# Altium PCB STM 32 F4 Robusta V1.PcbDoc (part 3 of 7)
Units mm, origin at the board's own origin, x right, y up, seen from the top; angles counter-clockwise.
Board outline 287.78 x 230 mm, 2 copper layers (Top Layer, Bottom Layer); 54 components, 96 nets, 355 pads, 16 vias.
Unrouted connection lines stored in the file: 3.
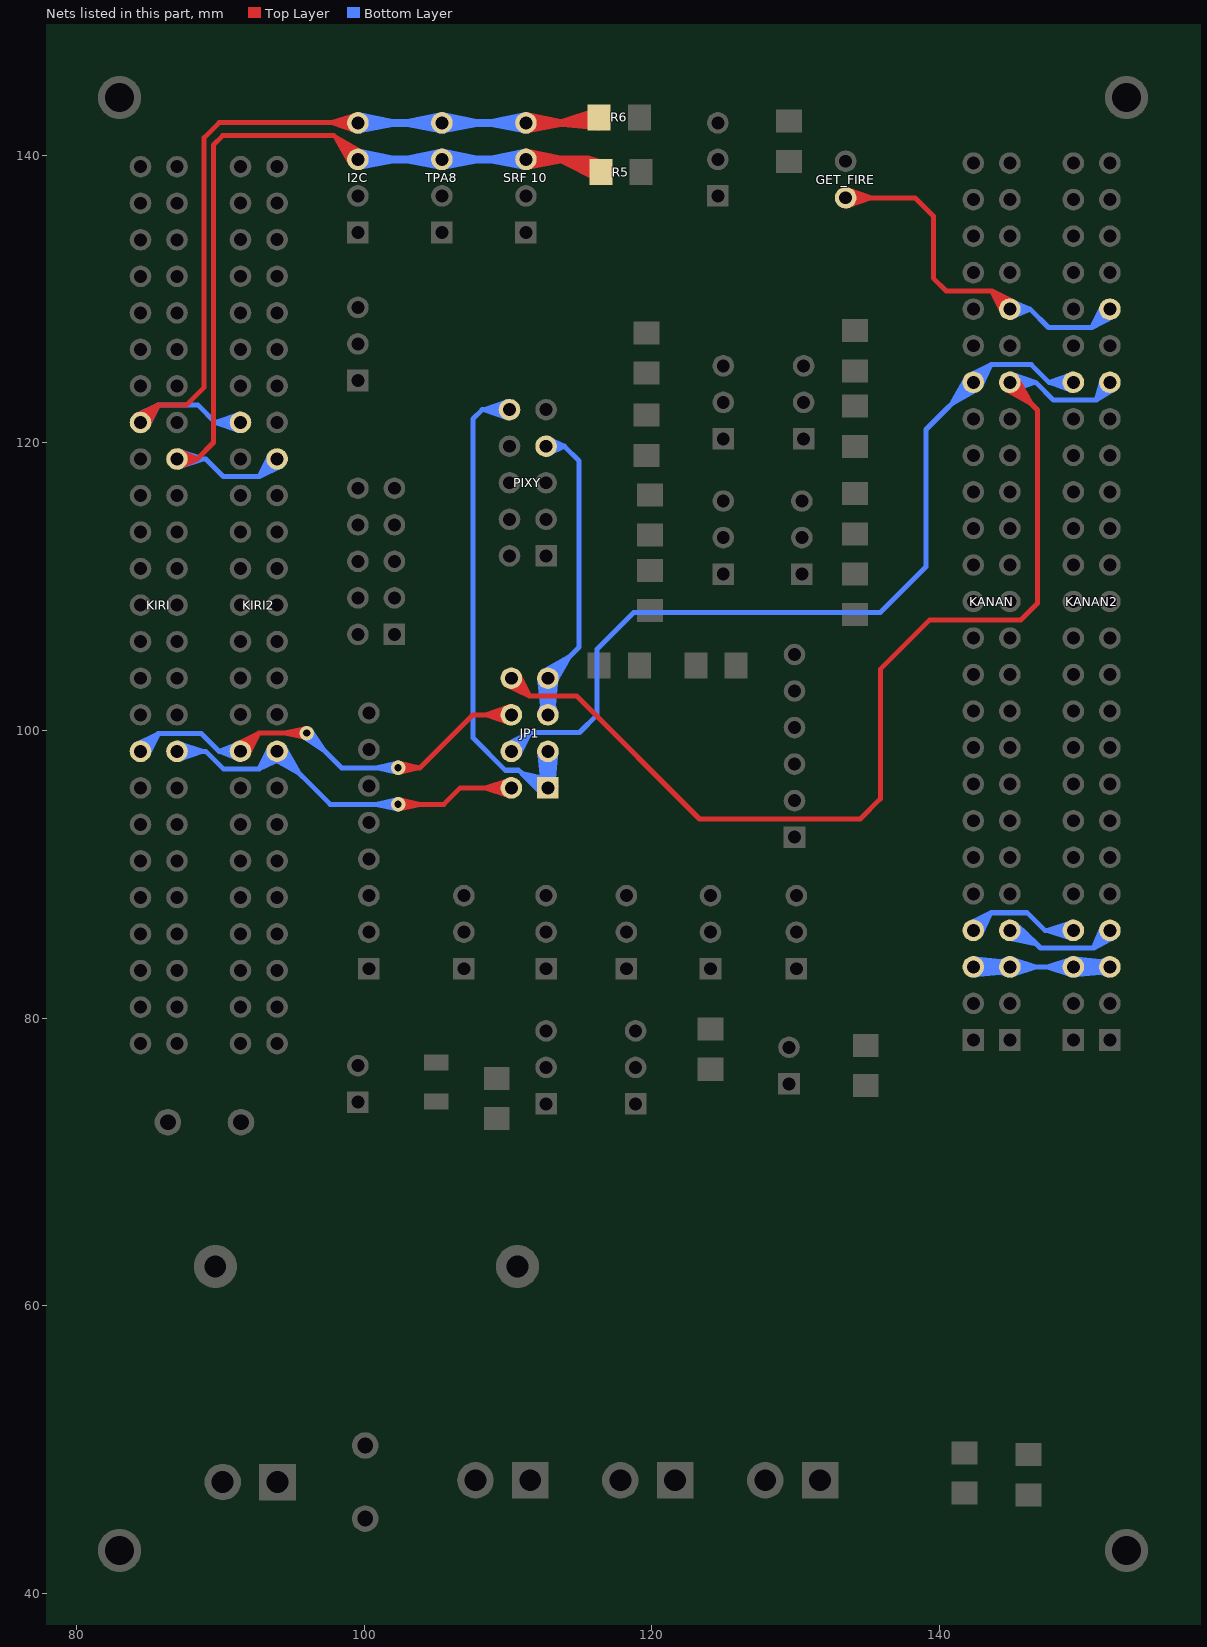
[diagram p3: the nets of this part, all layers, seen from the top]

## Via types
v1: diameter 1, hole 0.5, Top Layer to Bottom Layer, 13 vias
v2: diameter 0.8, hole 0.5, Top Layer to Bottom Layer, 3 vias

## Nets (pads, with @x,y where several pads share a name; then routed paths per layer and width w, separated by ;. In a path a pad name is that pad's centre, name@x,y a point inside that pad or via, vN(x,y) a via of type N, cw(c..) or ccw(c..) an arc to the next point about the centre after c; other vN are vias at no path point) (continued)
NetGET_FIRE_2: GET_FIRE.2 KANAN2.41 KANAN.41 | length 105.9
  Top Layer w0.35: GET_FIRE.2@133.512,136.811 134.506,137.08 ; GET_FIRE.2@133.512,137.255 134.506,136.986 ; GET_FIRE.2@133.569,136.465 135.277,137.033 ; GET_FIRE.2@133.569,137.601 135.277,137.033 ; GET_FIRE.2@133.612,136.474 134.506,136.986 ; GET_FIRE.2@133.612,137.592 134.506,137.08 ; GET_FIRE.2@133.663,136.489 134.506,137.08 ; GET_FIRE.2@133.663,137.577 134.506,136.986 ; GET_FIRE.2@133.884,136.626 cw(c134.865,135.645) 134.865,137.033 cw(c134.865,138.421) GET_FIRE.2@133.884,137.44 ; KANAN.41@144.315,129.286 ccw(c142.927,129.286) 143.908,130.268 ccw(c144.89,131.249) KANAN.41@144.89,129.861 ; KANAN.41@144.374,129.033 144.196,130.047 ; KANAN.41@144.399,128.986 144.129,129.98 ; KANAN.41@144.424,128.95 143.62,130.556 ; KANAN.41@144.708,129.153 144.196,130.047 ; KANAN.41@145.023,129.468 144.129,129.98 ; KANAN.41@145.143,129.802 144.129,129.98 ; KANAN.41@145.19,129.777 144.196,130.047 ; KANAN.41@145.226,129.752 143.62,130.556 ; GET_FIRE.2@133.477,137.033 134.506,137.08 ; GET_FIRE.2@133.477,137.033 134.506,136.986 ; GET_FIRE.2@133.477,137.033 138.303,137.033 139.573,135.763 139.573,131.445 140.462,130.556 143.62,130.556 ; 134.506,136.986 133.491,136.808 135.277,137.033 ; 134.506,137.08 133.491,137.258 135.277,137.033 ; 143.62,130.556 KANAN.41@144.89,129.286 ; 143.62,130.556 145.039,129.455 144.196,130.047 ; 143.62,130.556 144.721,129.137 144.129,129.98 ; 143.62,130.556 KANAN.41@144.89,129.286 ; 144.129,129.98 KANAN.41@144.89,129.286 ; 144.196,130.047 KANAN.41@144.89,129.286
  Bottom Layer w0.35: KANAN.41@144.904,129.061 145.919,129.239 ; KANAN.41@144.904,129.511 145.919,129.333 ; KANAN.41@144.908,129.062 146.304,129.286 ; KANAN.41@144.908,129.51 146.304,129.286 ; KANAN.41@144.925,129.064 145.919,129.333 ; KANAN.41@144.925,129.508 145.919,129.239 ; KANAN.41@145.007,128.723 146.304,129.286 ; KANAN.41@145.007,129.849 146.304,129.286 ; KANAN.41@145.025,128.727 145.919,129.239 ; KANAN.41@145.025,129.845 145.919,129.333 ; KANAN.41@145.076,128.742 145.919,129.333 ; KANAN.41@145.076,129.83 145.919,129.239 ; KANAN.41@145.297,128.879 cw(c146.278,127.898) 146.278,129.286 cw(c146.278,130.674) KANAN.41@145.297,129.693 ; KANAN2.41@151.27,129.286 cw(c149.882,129.286) 150.863,128.304 cw(c151.845,127.323) KANAN2.41@151.845,128.711 ; KANAN2.41@151.329,129.539 151.151,128.525 ; KANAN2.41@151.354,129.586 151.084,128.592 ; KANAN2.41@151.379,129.622 150.575,128.016 ; KANAN2.41@151.663,129.419 151.151,128.525 ; KANAN2.41@151.978,129.104 151.084,128.592 ; KANAN2.41@152.099,128.77 151.084,128.592 ; KANAN2.41@152.145,128.795 151.151,128.525 ; KANAN2.41@152.181,128.82 150.575,128.016 ; KANAN.41@144.89,129.286 145.919,129.333 ; KANAN.41@144.89,129.286 145.919,129.239 ; KANAN.41@144.89,129.286 146.304,129.286 ; 146.304,129.286 147.574,128.016 150.575,128.016 ; 150.575,128.016 KANAN2.41@151.845,129.286 ; 150.575,128.016 151.676,129.435 151.084,128.592 ; 150.575,128.016 151.994,129.117 151.151,128.525 ; 150.575,128.016 KANAN2.41@151.845,129.286 ; 151.084,128.592 KANAN2.41@151.845,129.286 ; 151.151,128.525 KANAN2.41@151.845,129.286
NetI2C_3: "SRF 10.3" I2C.3 KIRI2.33 KIRI.33 R5.1 TPA8.3 | length 233.8
  Top Layer w0.35: KIRI.33@87.009,118.647 88.024,118.825 ; KIRI.33@87.009,119.097 88.024,118.919 ; KIRI.33@87.013,118.648 88.392,118.872 ; KIRI.33@87.013,119.096 88.392,118.872 ; KIRI.33@87.03,118.65 88.024,118.919 ; KIRI.33@87.03,119.094 88.024,118.825 ; KIRI.33@87.113,118.309 88.392,118.872 ; KIRI.33@87.113,119.435 88.392,118.872 ; KIRI.33@87.13,118.313 88.024,118.825 ; KIRI.33@87.13,119.431 88.024,118.919 ; KIRI.33@87.181,118.328 88.024,118.919 ; KIRI.33@87.181,119.416 88.024,118.825 ; KIRI.33@87.402,118.465 cw(c88.383,117.484) 88.383,118.872 cw(c88.383,120.26) KIRI.33@87.402,119.279 ; I2C.3@98.993,139.7 ccw(c97.605,139.7) 98.586,140.682 ccw(c99.568,141.663) I2C.3@99.568,140.275 ; I2C.3@99.052,139.447 98.874,140.461 ; I2C.3@99.077,139.4 98.807,140.394 ; I2C.3@99.11,139.353 98.076,141.192 ; I2C.3@99.386,139.567 98.874,140.461 ; I2C.3@99.399,139.551 98.807,140.394 ; I2C.3@99.401,139.55 98.076,141.192 ; I2C.3@99.701,139.882 98.807,140.394 ; I2C.3@99.717,139.869 98.874,140.461 ; I2C.3@99.718,139.867 98.076,141.192 ; I2C.3@99.821,140.216 98.807,140.394 ; I2C.3@99.868,140.191 98.874,140.461 ; I2C.3@99.915,140.158 98.076,141.192 ; KIRI.33@86.995,118.872 88.024,118.919 ; KIRI.33@86.995,118.872 88.024,118.825 ; KIRI.33@86.995,118.872 88.392,118.872 ; 88.392,118.872 89.535,120.015 89.535,140.716 90.17,141.351 97.917,141.351 I2C.3@99.568,139.7 ; 98.076,141.192 I2C.3@99.568,139.7 ; 98.807,140.394 I2C.3@99.568,139.7 ; 98.874,140.461 I2C.3@99.568,139.7
  Top Layer w0.55: 111.299,139.227 113.652,139.7 111.299,140.173 ; 111.364,139.238 112.102,139.661 ; 111.364,140.162 112.102,139.739 ; 111.405,139.25 112.102,139.739 ; 111.405,140.15 112.102,139.661 ; 111.588,139.364 cw(c112.399,138.553) 112.399,139.7 cw(c112.399,140.847) 111.588,140.036 ; 113.284,139.7 cw(c113.284,135.739) R5.1@116.085,138.54 ; 114.612,139.7 cw(c114.612,137.067) R5.1@116.474,138.929 ; 115.63,139.637 cw(c114.905,138.911) R5.1@115.931,138.911 ; R5.1@116.104,138.522 115.293,139.61 ; R5.1@116.245,138.43 114.309,139.565 ; R5.1@116.265,138.422 113.708,139.7 ; R5.1@116.38,139.43 cw(c116.242,140.375) 115.567,139.7 ; R5.1@116.456,138.811 115.567,139.7 ; R5.1@116.549,139.428 114.309,139.565 ; R5.1@116.554,139.427 113.708,139.7 ; R5.1@116.634,139.405 115.293,139.61 ; 111.252,139.7 112.102,139.739 ; 111.252,139.7 112.102,139.661 ; 111.252,139.7 115.567,139.7 ; 113.708,139.7 R5.1@116.456,138.911 ; 114.309,139.565 R5.1@116.456,138.911 ; 115.293,139.61 R5.1@116.456,138.911 ; 115.567,139.7 R5.1@116.456,138.911 ; 115.567,139.7 116.709,139.371 115.567,139.7 ; 115.567,139.7 116.029,138.605 115.567,139.7 ; 115.567,139.7 R5.1@116.456,138.911
  Bottom Layer w0.35: KIRI.33@87.03,118.65 88.024,118.919 ; KIRI.33@87.03,119.094 88.024,118.825 ; KIRI.33@87.087,118.304 88.795,118.872 ; KIRI.33@87.087,119.44 88.795,118.872 ; KIRI.33@87.13,118.313 88.024,118.825 ; KIRI.33@87.13,119.431 88.024,118.919 ; KIRI.33@87.181,118.328 88.024,118.919 ; KIRI.33@87.181,119.416 88.024,118.825 ; KIRI.33@87.402,118.465 cw(c88.383,117.484) 88.383,118.872 cw(c88.383,120.26) KIRI.33@87.402,119.279 ; KIRI2.33@93.375,118.877 cw(c91.987,118.877) 92.968,117.895 cw(c93.95,116.914) KIRI2.33@93.95,118.302 ; KIRI2.33@93.434,119.13 93.256,118.116 ; KIRI2.33@93.459,119.177 93.189,118.183 ; KIRI2.33@93.482,119.21 92.725,117.652 ; KIRI2.33@93.768,119.01 93.256,118.116 ; KIRI2.33@94.083,118.695 93.189,118.183 ; KIRI2.33@94.203,118.361 93.189,118.183 ; KIRI2.33@94.25,118.386 93.256,118.116 ; KIRI2.33@94.283,118.409 92.725,117.652 ; KIRI.33@86.995,118.872 88.024,118.919 ; KIRI.33@86.995,118.872 88.024,118.825 ; KIRI.33@86.995,118.872 88.997,118.872 90.217,117.652 92.725,117.652 ; 88.024,118.825 87.009,118.647 88.795,118.872 ; 88.024,118.919 87.009,119.097 88.795,118.872 ; 92.725,117.652 KIRI2.33@93.95,118.877 ; 92.725,117.652 93.781,119.025 93.189,118.183 ; 92.725,117.652 94.098,118.708 93.256,118.116 ; 92.725,117.652 KIRI2.33@93.95,118.877 ; 93.189,118.183 KIRI2.33@93.95,118.877 ; 93.256,118.116 KIRI2.33@93.95,118.877
  Bottom Layer w0.55: I2C.3@99.615,139.227 101.968,139.7 I2C.3@99.615,140.173 ; I2C.3@99.68,139.238 100.418,139.661 ; I2C.3@99.68,140.162 100.418,139.739 ; I2C.3@99.721,139.25 100.418,139.739 ; I2C.3@99.721,140.15 100.418,139.661 ; I2C.3@99.904,139.364 cw(c100.715,138.553) 100.715,139.7 cw(c100.715,140.847) I2C.3@99.904,140.036 ; TPA8.3@105.074,139.364 ccw(c104.263,138.553) 104.263,139.7 ccw(c104.263,140.847) TPA8.3@105.074,140.036 ; TPA8.3@105.257,139.25 104.56,139.739 ; TPA8.3@105.257,140.15 104.56,139.661 ; TPA8.3@105.298,139.238 104.56,139.661 ; TPA8.3@105.298,140.162 104.56,139.739 ; TPA8.3@105.363,139.227 103.01,139.7 TPA8.3@105.363,140.173 ; TPA8.3@105.457,139.227 107.81,139.7 TPA8.3@105.457,140.173 ; TPA8.3@105.522,139.238 106.26,139.661 ; TPA8.3@105.522,140.162 106.26,139.739 ; TPA8.3@105.563,139.25 106.26,139.739 ; TPA8.3@105.563,140.15 106.26,139.661 ; TPA8.3@105.746,139.364 cw(c106.557,138.553) 106.557,139.7 cw(c106.557,140.847) TPA8.3@105.746,140.036 ; 110.916,139.364 ccw(c110.105,138.553) 110.105,139.7 ccw(c110.105,140.847) 110.916,140.036 ; 111.099,139.25 110.402,139.739 ; 111.099,140.15 110.402,139.661 ; 111.14,139.238 110.402,139.661 ; 111.14,140.162 110.402,139.739 ; 111.205,139.227 108.852,139.7 111.205,140.173 ; I2C.3@99.568,139.7 100.418,139.739 ; I2C.3@99.568,139.7 100.418,139.661 ; I2C.3@99.568,139.7 TPA8.3@105.41,139.7 ; 104.56,139.661 TPA8.3@105.41,139.7 ; 104.56,139.739 TPA8.3@105.41,139.7 ; TPA8.3@105.41,139.7 106.26,139.739 ; TPA8.3@105.41,139.7 106.26,139.661 ; TPA8.3@105.41,139.7 111.252,139.7 ; 110.402,139.661 111.252,139.7 ; 110.402,139.739 111.252,139.7
NetI2C_4: "SRF 10.4" I2C.4 KIRI2.36 KIRI.36 R6.1 TPA8.4 | length 212
  Top Layer w0.35: KIRI.36@84.122,121.88 85.68,122.637 ; KIRI.36@84.155,121.903 85.149,122.173 ; KIRI.36@84.202,121.928 85.216,122.106 ; KIRI.36@84.322,121.594 85.216,122.106 ; KIRI.36@84.455,121.987 ccw(c84.455,123.375) 85.437,122.394 ccw(c86.418,121.412) KIRI.36@85.03,121.412 ; KIRI.36@84.637,121.279 85.149,122.173 ; KIRI.36@84.923,121.079 85.68,122.637 ; KIRI.36@84.946,121.112 85.216,122.106 ; KIRI.36@84.971,121.159 85.149,122.173 ; 98.144,142.255 cw(c98.144,140.816) I2C.4@99.161,141.833 ; 98.216,142.255 ccw(c98.216,143.592) I2C.4@99.161,142.647 ; I2C.4@99.371,141.7 98.562,142.301 ; I2C.4@99.393,142.788 98.516,142.206 ; I2C.4@99.429,141.682 98.516,142.206 ; I2C.4@99.437,142.8 98.562,142.301 ; I2C.4@99.471,141.673 97.768,142.255 ; I2C.4@99.481,142.808 97.768,142.255 ; I2C.4@99.529,142.018 98.562,142.301 ; I2C.4@99.537,142.463 98.516,142.206 ; I2C.4@99.556,142.465 97.768,142.255 ; I2C.4@99.556,142.465 98.562,142.301 ; KIRI.36@84.455,121.412 85.149,122.173 ; KIRI.36@84.455,121.412 85.216,122.106 ; KIRI.36@84.455,121.412 85.68,122.637 ; 85.149,122.173 84.306,121.581 85.68,122.637 ; 85.216,122.106 84.624,121.263 85.68,122.637 ; 85.68,122.637 87.666,122.637 88.885,123.856 88.885,141.209 89.931,142.255 99.553,142.255 I2C.4@99.568,142.24 ; 97.768,142.255 I2C.4@99.568,142.24 ; 97.768,142.255 99.552,142.016 98.516,142.206 ; 98.516,142.206 I2C.4@99.568,142.24 ; 98.562,142.301 I2C.4@99.568,142.24
  Top Layer w0.55: 111.299,141.767 113.652,142.24 111.299,142.713 ; 111.364,141.778 112.102,142.201 ; 111.364,142.702 112.102,142.279 ; 111.405,141.79 112.102,142.279 ; 111.405,142.69 112.102,142.201 ; 111.588,141.904 cw(c112.399,141.093) 112.399,142.24 cw(c112.399,143.387) 111.588,142.576 ; 114.383,142.24 ccw(c114.383,144.467) R6.1@115.958,142.892 ; R6.1@115.948,142.24 111.252,142.24 ; R6.1@116.154,143.016 114.959,142.316 ; R6.1@116.219,143.034 113.77,142.24 ; R6.1@116.307,141.996 114.959,142.316 ; R6.1@116.333,141.996 113.77,142.24 ; 111.252,142.24 112.102,142.279 ; 111.252,142.24 112.102,142.201 ; 113.77,142.24 116.329,142.521 114.959,142.316
  Bottom Layer w0.35: KIRI.36@84.122,121.88 85.68,122.637 ; KIRI.36@84.155,121.903 85.149,122.173 ; KIRI.36@84.202,121.928 85.216,122.106 ; KIRI.36@84.322,121.594 85.216,122.106 ; KIRI.36@84.455,121.987 ccw(c84.455,123.375) 85.437,122.394 ccw(c86.418,121.412) KIRI.36@85.03,121.412 ; KIRI.36@84.637,121.279 85.149,122.173 ; KIRI.36@84.923,121.079 85.68,122.637 ; KIRI.36@84.946,121.112 85.216,122.106 ; KIRI.36@84.971,121.159 85.149,122.173 ; KIRI2.36@91.003,121.01 ccw(c90.022,120.029) 90.022,121.417 ccw(c90.022,122.805) KIRI2.36@91.003,121.824 ; KIRI2.36@91.224,120.873 90.381,121.464 ; KIRI2.36@91.224,121.961 90.381,121.37 ; KIRI2.36@91.275,120.858 90.381,121.37 ; KIRI2.36@91.275,121.976 90.381,121.464 ; KIRI2.36@91.316,120.85 89.657,121.417 ; KIRI2.36@91.316,121.984 89.657,121.417 ; KIRI2.36@91.375,121.195 90.381,121.464 ; KIRI2.36@91.375,121.639 90.381,121.37 ; KIRI.36@84.455,121.412 85.149,122.173 ; KIRI.36@84.455,121.412 85.216,122.106 ; KIRI.36@84.455,121.412 85.68,122.637 ; 85.149,122.173 84.306,121.581 85.68,122.637 ; 85.216,122.106 84.624,121.263 85.68,122.637 ; 85.68,122.637 88.437,122.637 89.657,121.417 ; 89.657,121.417 KIRI2.36@91.41,121.417 ; 89.657,121.417 91.396,121.642 90.381,121.464 ; 89.657,121.417 91.396,121.192 90.381,121.37 ; 89.657,121.417 KIRI2.36@91.41,121.417 ; 90.381,121.37 KIRI2.36@91.41,121.417 ; 90.381,121.464 KIRI2.36@91.41,121.417
  Bottom Layer w0.55: I2C.4@99.615,141.767 101.968,142.24 I2C.4@99.615,142.713 ; I2C.4@99.68,141.778 100.418,142.201 ; I2C.4@99.68,142.702 100.418,142.279 ; I2C.4@99.721,141.79 100.418,142.279 ; I2C.4@99.721,142.69 100.418,142.201 ; I2C.4@99.904,141.904 cw(c100.715,141.093) 100.715,142.24 cw(c100.715,143.387) I2C.4@99.904,142.576 ; TPA8.4@105.074,141.904 ccw(c104.263,141.093) 104.263,142.24 ccw(c104.263,143.387) TPA8.4@105.074,142.576 ; TPA8.4@105.257,141.79 104.56,142.279 ; TPA8.4@105.257,142.69 104.56,142.201 ; TPA8.4@105.298,141.778 104.56,142.201 ; TPA8.4@105.298,142.702 104.56,142.279 ; TPA8.4@105.363,141.767 103.01,142.24 TPA8.4@105.363,142.713 ; TPA8.4@105.457,141.767 107.81,142.24 TPA8.4@105.457,142.713 ; TPA8.4@105.522,141.778 106.26,142.201 ; TPA8.4@105.522,142.702 106.26,142.279 ; TPA8.4@105.563,141.79 106.26,142.279 ; TPA8.4@105.563,142.69 106.26,142.201 ; TPA8.4@105.746,141.904 cw(c106.557,141.093) 106.557,142.24 cw(c106.557,143.387) TPA8.4@105.746,142.576 ; 110.916,141.904 ccw(c110.105,141.093) 110.105,142.24 ccw(c110.105,143.387) 110.916,142.576 ; 111.099,141.79 110.402,142.279 ; 111.099,142.69 110.402,142.201 ; 111.14,141.778 110.402,142.201 ; 111.14,142.702 110.402,142.279 ; 111.205,141.767 108.852,142.24 111.205,142.713 ; I2C.4@99.568,142.24 100.418,142.279 ; I2C.4@99.568,142.24 100.418,142.201 ; I2C.4@99.568,142.24 TPA8.4@105.41,142.24 ; 104.56,142.201 TPA8.4@105.41,142.24 ; 104.56,142.279 TPA8.4@105.41,142.24 ; TPA8.4@105.41,142.24 106.26,142.279 ; TPA8.4@105.41,142.24 106.26,142.201 ; TPA8.4@105.41,142.24 111.252,142.24 ; 110.402,142.201 111.252,142.24 ; 110.402,142.279 111.252,142.24
NetJP1_1: JP1.1 JP1.3 PIXY.1 | length 166.6
  Bottom Layer w0.35: PIXY.1@109.702,121.894 ccw(c108.721,120.913) 108.721,122.301 ccw(c108.721,123.689) PIXY.1@109.702,122.708 ; PIXY.1@109.923,121.757 109.08,122.348 ; PIXY.1@109.923,122.845 109.08,122.254 ; PIXY.1@109.974,121.742 109.08,122.254 ; PIXY.1@109.974,122.86 109.08,122.348 ; PIXY.1@110.017,121.733 108.309,122.301 ; PIXY.1@110.017,122.869 108.309,122.301 ; PIXY.1@110.074,122.079 109.08,122.348 ; PIXY.1@110.074,122.523 109.08,122.254 ; 111.241,96.74 ccw(c112.5,97.999) JP1.1@112.745,96.235 ; 111.738,96.242 ccw(c112.621,97.125) JP1.1@112.793,95.888 ; JP1.3@112.202,98.582 JP1.1@112.39,96.65 ; JP1.3@112.203,98.506 JP1.1@112.637,96.703 ; JP1.1@112.208,96.104 JP1.3@112.776,97.812 ; JP1.3@112.208,98.46 JP1.1@112.776,96.752 ; JP1.3@112.216,98.42 JP1.1@112.915,96.703 ; JP1.1@112.217,96.147 112.729,97.041 ; JP1.3@112.217,98.417 112.729,97.523 ; JP1.1@112.233,95.824 ccw(c111.968,95.732) 111.968,96.012 ; JP1.1@112.232,96.198 112.823,97.041 ; JP1.1@112.233,96.2 cw(c111.968,96.292) 111.968,96.012 ; JP1.3@112.232,98.366 112.823,97.523 ; JP1.3@112.236,98.355 JP1.1@113.162,96.65 ; JP1.1@112.369,96.419 ccw(c111.388,97.4) 112.776,97.4 ccw(c114.164,97.4) JP1.1@113.183,96.419 ; JP1.3@112.369,98.145 cw(c111.388,97.164) 112.776,97.164 cw(c114.164,97.164) JP1.3@113.183,98.145 ; JP1.1@112.399,95.577 111.509,96.729 ; JP1.1@112.431,95.552 110.977,97.003 ; JP1.1@112.436,95.548 111.83,96.349 ; JP1.3@112.551,98.555 JP1.1@112.637,96.703 ; JP1.3@112.553,98.521 JP1.1@112.915,96.703 ; JP1.1@112.554,96.047 112.823,97.041 ; JP1.3@112.554,98.517 112.823,97.523 ; JP1.3@112.553,98.584 JP1.1@112.39,96.65 ; JP1.3@112.558,98.495 JP1.1@113.162,96.65 ; JP1.1@112.65,95.825 111.509,96.729 ; JP1.1@112.657,95.821 110.977,97.003 ; JP1.1@112.677,95.81 111.83,96.349 ; JP1.1@112.697,96.582 cw(c112.379,98.872) 110.743,97.237 ; JP1.1@112.806,96.586 111.83,96.349 ; JP1.1@112.827,96.231 111.83,96.349 ; JP1.1@112.871,96.216 111.509,96.729 ; JP1.1@112.874,96.215 110.977,97.003 ; JP1.1@112.955,96.558 111.509,96.729 ; JP1.1@112.98,96.549 110.977,97.003 ; JP1.3@112.994,98.495 JP1.1@112.39,96.65 ; JP1.1@112.998,96.047 112.729,97.041 ; JP1.3@112.998,98.517 112.729,97.523 ; JP1.3@112.999,98.584 JP1.1@113.162,96.65 ; JP1.3@112.999,98.521 JP1.1@112.637,96.703 ; JP1.3@113.001,98.555 JP1.1@112.915,96.703 ; JP1.3@113.316,98.355 JP1.1@112.39,96.65 ; JP1.1@113.32,96.198 112.729,97.041 ; JP1.3@113.32,98.366 112.729,97.523 ; JP1.1@113.335,96.147 112.823,97.041 ; JP1.3@113.335,98.417 112.823,97.523 ; JP1.3@113.336,98.42 JP1.1@112.637,96.703 ; JP1.1@113.344,96.104 JP1.3@112.776,97.812 ; JP1.3@113.344,98.46 JP1.1@112.776,96.752 ; JP1.3@113.349,98.506 JP1.1@112.915,96.703 ; JP1.3@113.35,98.582 JP1.1@113.162,96.65 ; 108.309,122.301 110.095,122.526 109.08,122.348 ; 108.309,122.301 110.095,122.076 109.08,122.254 ; 109.08,122.254 PIXY.1@110.109,122.301 ; 109.08,122.348 PIXY.1@110.109,122.301 ; PIXY.1@110.109,122.301 108.204,122.301 107.569,121.666 107.569,99.487 109.819,97.237 110.743,97.237 ; 110.743,97.237 111.968,96.012 ; 110.977,97.003 JP1.1@112.776,96.012 ; 111.509,96.729 JP1.1@112.776,96.012 ; 111.83,96.349 JP1.1@112.776,96.012 ; 111.968,96.012 JP1.1@112.776,96.012 ; 111.968,96.012 112.745,96.235 111.968,96.012 ; 111.968,96.012 112.745,95.789 111.968,96.012 ; 111.968,96.012 112.571,96.549 111.968,96.012 ; 111.968,96.012 112.571,95.475 111.968,96.012 ; 111.968,96.012 JP1.1@112.776,96.012 ; JP1.1@112.39,96.65 JP1.3@112.776,98.552 ; JP1.1@112.637,96.703 JP1.3@112.776,98.552 ; 112.729,97.041 JP1.1@112.776,96.012 ; 112.729,97.041 112.551,96.026 JP1.3@112.776,97.812 ; 112.729,97.523 JP1.3@112.776,98.552 ; 112.729,97.523 112.551,98.538 JP1.1@112.776,96.752 ; JP1.1@112.776,96.012 112.823,97.041 ; JP1.1@112.776,96.012 JP1.3@112.776,98.552 ; JP1.1@112.776,96.752 113.001,98.538 112.823,97.523 ; JP1.3@112.776,97.812 113.001,96.026 112.823,97.041 ; JP1.3@112.776,98.552 JP1.1@112.915,96.703 ; JP1.3@112.776,98.552 JP1.1@113.162,96.65 ; JP1.3@112.776,98.552 112.823,97.523
NetJP1_2: JP1.2 KIRI2.17 KIRI.17 | length 124.9
  Top Layer w0.35: v1@102.396,94.546 103.912,94.869 v1@102.396,95.192 ; v1@102.438,94.553 102.944,94.842 ; v1@102.438,95.185 102.944,94.896 ; v1@102.467,94.561 102.944,94.896 ; v1@102.467,95.177 102.944,94.842 ; v1@102.592,94.639 cw(c103.147,94.084) 103.147,94.869 cw(c103.147,95.654) v1@102.592,95.099 ; JP1.2@109.829,95.605 ccw(c108.848,94.624) 108.848,96.012 ccw(c108.848,97.4) JP1.2@109.829,96.419 ; JP1.2@110.05,95.468 109.207,96.059 ; JP1.2@110.05,96.556 109.207,95.965 ; JP1.2@110.101,95.453 109.207,95.965 ; JP1.2@110.101,96.571 109.207,96.059 ; JP1.2@110.144,95.444 108.436,96.012 ; JP1.2@110.144,96.58 108.436,96.012 ; JP1.2@110.201,95.79 109.207,96.059 ; JP1.2@110.201,96.234 109.207,95.965 ; v1(102.362,94.869) 102.944,94.896 ; v1(102.362,94.869) 102.944,94.842 ; v1(102.362,94.869) 105.537,94.869 106.68,96.012 JP1.2@110.236,96.012 ; 108.436,96.012 110.222,96.237 109.207,96.059 ; 108.436,96.012 110.222,95.787 109.207,95.965 ; 109.207,95.965 JP1.2@110.236,96.012 ; 109.207,96.059 JP1.2@110.236,96.012
  Bottom Layer w0.35: KIRI.17@87.03,98.33 88.024,98.599 ; KIRI.17@87.03,98.774 88.024,98.505 ; KIRI.17@87.087,97.984 88.795,98.552 ; KIRI.17@87.087,99.12 88.795,98.552 ; KIRI.17@87.13,97.993 88.024,98.505 ; KIRI.17@87.13,99.111 88.024,98.599 ; KIRI.17@87.181,98.008 88.024,98.599 ; KIRI.17@87.181,99.096 88.024,98.505 ; KIRI.17@87.402,98.145 cw(c88.383,97.164) 88.383,98.552 cw(c88.383,99.94) KIRI.17@87.402,98.959 ; KIRI2.17@93.375,98.557 cw(c91.987,98.557) 92.968,97.575 cw(c93.95,96.594) 93.95,97.982 cw(c93.95,96.594) 94.932,97.575 cw(c95.913,98.557) KIRI2.17@94.525,98.557 ; KIRI2.17@93.434,98.81 93.256,97.796 ; KIRI2.17@93.459,98.857 93.189,97.863 ; KIRI2.17@93.482,98.89 92.725,97.332 ; KIRI2.17@93.603,98.099 95.442,97.065 ; KIRI2.17@93.65,98.066 94.644,97.796 ; KIRI2.17@93.696,98.041 94.711,97.863 ; KIRI2.17@93.768,98.69 93.256,97.796 ; KIRI2.17@93.8,98.39 95.442,97.065 ; KIRI2.17@93.801,98.388 94.644,97.796 ; KIRI2.17@93.817,98.375 94.711,97.863 ; KIRI2.17@94.083,98.375 93.189,97.863 ; KIRI2.17@94.117,98.707 95.442,97.065 ; KIRI2.17@94.119,98.706 94.711,97.863 ; KIRI2.17@94.132,98.69 94.644,97.796 ; KIRI2.17@94.203,98.041 93.189,97.863 ; KIRI2.17@94.25,98.066 93.256,97.796 ; KIRI2.17@94.283,98.089 92.725,97.332 ; KIRI2.17@94.408,98.904 95.442,97.065 ; KIRI2.17@94.441,98.857 94.711,97.863 ; KIRI2.17@94.466,98.81 94.644,97.796 ; v1@102.132,94.639 ccw(c101.577,94.084) 101.577,94.869 ccw(c101.577,95.654) v1@102.132,95.099 ; v1@102.257,94.561 101.78,94.896 ; v1@102.257,95.177 101.78,94.842 ; v1@102.286,94.553 101.78,94.842 ; v1@102.286,95.185 101.78,94.896 ; v1@102.328,94.546 100.812,94.869 ; v1@102.328,95.192 100.812,94.869 ; KIRI.17@86.995,98.552 88.024,98.599 ; KIRI.17@86.995,98.552 88.024,98.505 ; KIRI.17@86.995,98.552 88.997,98.552 90.217,97.332 92.725,97.332 ; 88.024,98.505 87.009,98.327 88.795,98.552 ; 88.024,98.599 87.009,98.777 88.795,98.552 ; 92.725,97.332 KIRI2.17@93.95,98.557 ; 92.725,97.332 93.781,98.705 93.189,97.863 ; 92.725,97.332 94.098,98.388 93.256,97.796 ; 92.725,97.332 KIRI2.17@93.95,98.557 ; 93.189,97.863 KIRI2.17@93.95,98.557 ; 93.256,97.796 KIRI2.17@93.95,98.557 ; KIRI2.17@93.95,98.557 94.711,97.863 ; KIRI2.17@93.95,98.557 94.644,97.796 ; KIRI2.17@93.95,98.557 97.638,94.869 v1(102.362,94.869) ; 100.812,94.869 v1(102.362,94.869) ; 101.78,94.842 v1(102.362,94.869) ; 101.78,94.896 v1(102.362,94.869)
NetJP1_4: JP1.4 KANAN2.38 KANAN.38 | length 142.3
  Bottom Layer w0.35: JP1.4@109.897,99.017 111.551,99.867 ; JP1.4@109.936,99.043 110.93,99.313 ; JP1.4@109.983,99.068 110.997,99.246 ; JP1.4@110.103,98.734 110.997,99.246 ; JP1.4@110.236,99.127 ccw(c110.236,100.515) 111.218,99.534 ccw(c112.199,98.552) JP1.4@110.811,98.552 ; JP1.4@110.418,98.419 110.93,99.313 ; JP1.4@110.701,98.213 111.551,99.867 ; JP1.4@110.727,98.252 110.997,99.246 ; JP1.4@110.752,98.299 110.93,99.313 ; KANAN.38@141.775,124.206 cw(c140.387,124.206) 141.368,123.224 cw(c142.35,122.243) KANAN.38@142.35,123.631 ; KANAN.38@141.834,124.459 141.656,123.445 ; KANAN.38@141.859,124.506 141.589,123.512 ; KANAN.38@141.892,124.553 140.858,122.714 ; KANAN.38@142.017,124.674 143.575,125.431 ; KANAN.38@142.05,124.697 143.044,124.967 ; KANAN.38@142.096,124.722 143.111,124.9 ; KANAN.38@142.168,124.339 141.656,123.445 ; KANAN.38@142.181,124.355 141.589,123.512 ; KANAN.38@142.183,124.356 140.858,122.714 ; KANAN.38@142.217,124.388 143.111,124.9 ; KANAN.38@142.35,124.781 ccw(c142.35,126.169) 143.332,125.188 ccw(c144.313,124.206) KANAN.38@142.925,124.206 ; KANAN.38@142.483,124.024 141.589,123.512 ; KANAN.38@142.499,124.037 141.656,123.445 ; KANAN.38@142.5,124.039 140.858,122.714 ; KANAN.38@142.532,124.073 143.044,124.967 ; KANAN.38@142.603,123.69 141.589,123.512 ; KANAN.38@142.65,123.715 141.656,123.445 ; KANAN.38@142.697,123.748 140.858,122.714 ; KANAN.38@142.818,123.873 143.575,125.431 ; KANAN.38@142.841,123.906 143.111,124.9 ; KANAN.38@142.866,123.953 143.044,124.967 ; KANAN2.38@148.898,123.799 ccw(c147.917,122.818) 147.917,124.206 ccw(c147.917,125.594) KANAN2.38@148.898,124.613 ; KANAN2.38@149.119,123.662 148.276,124.253 ; KANAN2.38@149.119,124.75 148.276,124.159 ; KANAN2.38@149.17,123.647 148.276,124.159 ; KANAN2.38@149.17,124.765 148.276,124.253 ; KANAN2.38@149.208,123.639 147.604,124.206 ; KANAN2.38@149.208,124.773 147.604,124.206 ; KANAN2.38@149.27,123.984 148.276,124.253 ; KANAN2.38@149.27,124.428 148.276,124.159 ; KANAN2.38@149.29,123.981 147.604,124.206 ; KANAN2.38@149.29,124.431 147.604,124.206 ; KANAN2.38@149.291,123.981 148.276,124.159 ; KANAN2.38@149.291,124.431 148.276,124.253 ; JP1.4@110.236,98.552 110.997,99.246 ; JP1.4@110.236,98.552 110.93,99.313 ; JP1.4@110.236,98.552 111.551,99.867 ; 110.93,99.313 110.087,98.721 111.551,99.867 ; 110.997,99.246 110.405,98.403 111.551,99.867 ; 111.551,99.867 114.98,99.867 116.205,101.092 116.205,105.664 118.745,108.204 135.89,108.204 139.065,111.379 139.065,120.921 KANAN.38@142.35,124.206 ; 140.858,122.714 KANAN.38@142.35,124.206 ; 141.589,123.512 KANAN.38@142.35,124.206 ; 141.656,123.445 KANAN.38@142.35,124.206 ; KANAN.38@142.35,124.206 143.044,124.967 ; KANAN.38@142.35,124.206 143.111,124.9 ; KANAN.38@142.35,124.206 143.575,125.431 ; 143.044,124.967 142.201,124.375 143.575,125.431 ; 143.111,124.9 142.519,124.057 143.575,125.431 ; 143.575,125.431 146.379,125.431 147.604,124.206 ; 147.604,124.206 KANAN2.38@149.305,124.206 ; 147.604,124.206 KANAN2.38@149.305,124.206 ; 148.276,124.159 KANAN2.38@149.305,124.206 ; 148.276,124.253 KANAN2.38@149.305,124.206
NetJP1_5: JP1.5 JP1.7 PIXY.4 | length 135.6
  Bottom Layer w0.35: JP1.7@112.202,103.662 JP1.5@112.39,101.73 ; JP1.7@112.203,103.586 JP1.5@112.637,101.783 ; JP1.5@112.208,101.184 JP1.7@112.776,102.892 ; JP1.7@112.208,103.54 JP1.5@112.776,101.832 ; JP1.7@112.216,103.5 JP1.5@112.915,101.783 ; JP1.5@112.217,101.227 112.729,102.121 ; JP1.7@112.217,103.497 112.729,102.603 ; JP1.5@112.232,101.278 112.823,102.121 ; JP1.7@112.232,103.446 112.823,102.603 ; JP1.7@112.236,103.435 JP1.5@113.162,101.73 ; JP1.5@112.369,101.499 ccw(c111.388,102.48) 112.776,102.48 ccw(c114.164,102.48) JP1.5@113.183,101.499 ; JP1.7@112.369,103.225 cw(c111.388,102.244) 112.776,102.244 cw(c114.164,102.244) JP1.7@113.183,103.225 ; JP1.7@112.429,104.09 114.268,105.124 ; JP1.7@112.476,104.123 113.47,104.393 ; JP1.7@112.523,104.148 113.537,104.326 ; JP1.7@112.551,103.635 JP1.5@112.637,101.783 ; JP1.7@112.553,103.601 JP1.5@112.915,101.783 ; JP1.5@112.554,101.127 112.823,102.121 ; JP1.7@112.554,103.597 112.823,102.603 ; JP1.7@112.553,103.664 JP1.5@112.39,101.73 ; JP1.7@112.558,103.575 JP1.5@113.162,101.73 ; JP1.7@112.626,103.799 114.268,105.124 ; JP1.7@112.627,103.801 113.47,104.393 ; JP1.7@112.643,103.814 113.537,104.326 ; PIXY.4@112.662,119.536 113.561,119.702 ; PIXY.4@112.662,119.986 113.561,119.82 ; PIXY.4@112.669,119.537 113.919,119.761 ; PIXY.4@112.669,119.985 113.919,119.761 ; PIXY.4@112.691,119.54 113.561,119.82 ; PIXY.4@112.691,119.982 113.561,119.702 ; JP1.7@112.776,104.207 ccw(c112.776,105.595) 113.758,104.614 ccw(c114.739,103.632) JP1.7@113.351,103.632 ; PIXY.4@112.779,119.201 113.919,119.761 ; PIXY.4@112.779,120.321 113.919,119.761 ; PIXY.4@112.794,119.205 113.561,119.702 ; PIXY.4@112.794,120.317 113.561,119.82 ; PIXY.4@112.865,119.228 113.561,119.82 ; PIXY.4@112.865,120.294 113.561,119.702 ; JP1.7@112.943,103.482 114.268,105.124 ; JP1.7@112.945,103.483 113.537,104.326 ; JP1.7@112.958,103.499 113.47,104.393 ; JP1.7@112.994,103.575 JP1.5@112.39,101.73 ; JP1.5@112.998,101.127 112.729,102.121 ; JP1.7@112.998,103.597 112.729,102.603 ; JP1.7@112.999,103.664 JP1.5@113.162,101.73 ; JP1.7@112.999,103.601 JP1.5@112.637,101.783 ; JP1.7@113.001,103.635 JP1.5@112.915,101.783 ; PIXY.4@113.081,119.382 cw(c113.919,118.646) 113.919,119.761 ; PIXY.4@113.081,120.14 ccw(c113.919,120.876) 113.919,119.761 ; JP1.7@113.234,103.285 114.268,105.124 ; JP1.7@113.267,103.332 113.537,104.326 ; JP1.7@113.292,103.379 113.47,104.393 ; JP1.7@113.316,103.435 JP1.5@112.39,101.73 ; JP1.5@113.32,101.278 112.729,102.121 ; JP1.7@113.32,103.446 112.729,102.603 ; JP1.5@113.335,101.227 112.823,102.121 ; JP1.7@113.335,103.497 112.823,102.603 ; JP1.7@113.336,103.5 JP1.5@112.637,101.783 ; JP1.5@113.344,101.184 JP1.7@112.776,102.892 ; JP1.7@113.344,103.54 JP1.5@112.776,101.832 ; JP1.7@113.349,103.586 JP1.5@112.915,101.783 ; JP1.7@113.35,103.662 JP1.5@113.162,101.73 ; JP1.5@112.39,101.73 JP1.7@112.776,103.632 ; JP1.5@112.637,101.783 JP1.7@112.776,103.632 ; PIXY.4@112.649,119.761 113.561,119.82 ; PIXY.4@112.649,119.761 113.561,119.702 ; PIXY.4@112.649,119.761 113.919,119.761 ; 112.729,102.121 JP1.5@112.776,101.092 ; 112.729,102.121 112.551,101.106 JP1.7@112.776,102.892 ; 112.729,102.603 JP1.7@112.776,103.632 ; 112.729,102.603 112.551,103.618 JP1.5@112.776,101.832 ; JP1.5@112.776,101.092 112.823,102.121 ; JP1.5@112.776,101.092 JP1.7@112.776,103.632 ; JP1.5@112.776,101.832 113.001,103.618 112.823,102.603 ; JP1.7@112.776,102.892 113.001,101.106 112.823,102.121 ; JP1.7@112.776,103.632 113.537,104.326 ; JP1.7@112.776,103.632 113.47,104.393 ; JP1.7@112.776,103.632 JP1.5@112.915,101.783 ; JP1.7@112.776,103.632 JP1.5@113.162,101.73 ; JP1.7@112.776,103.632 112.823,102.603 ; JP1.7@112.776,103.632 114.935,105.791 114.935,118.745 113.919,119.761
NetJP1_6: JP1.6 KIRI2.18 KIRI.18 | length 139.8
  Top Layer w0.35: KIRI2.18@91.074,99.024 92.675,99.822 ; KIRI2.18@91.11,99.048 92.104,99.318 ; KIRI2.18@91.156,99.073 92.171,99.251 ; KIRI2.18@91.277,98.739 92.171,99.251 ; KIRI2.18@91.41,99.132 ccw(c91.41,100.52) 92.392,99.539 ccw(c93.373,98.557) KIRI2.18@91.985,98.557 ; KIRI2.18@91.592,98.424 92.104,99.318 ; KIRI2.18@91.877,98.221 92.675,99.822 ; KIRI2.18@91.901,98.257 92.171,99.251 ; KIRI2.18@91.926,98.303 92.104,99.318 ; v1@95.782,99.592 ccw(c95.227,99.037) 95.227,99.822 ccw(c95.227,100.607) v1@95.782,100.052 ; v1@95.907,99.514 95.43,99.849 ; v1@95.907,100.13 95.43,99.795 ; v1@95.936,99.506 95.43,99.795 ; v1@95.936,100.138 95.43,99.849 ; v1@95.978,99.499 94.462,99.822 ; v1@95.978,100.145 94.462,99.822 ; v1@102.397,97.086 103.886,97.409 ; v1@102.397,97.732 103.886,97.409 ; v1@102.438,97.093 102.944,97.382 ; v1@102.438,97.725 102.944,97.436 ; v1@102.467,97.101 102.944,97.436 ; v1@102.467,97.717 102.944,97.382 ; v1@102.592,97.179 cw(c103.147,96.624) 103.147,97.409 cw(c103.147,98.194) v1@102.592,97.639 ; JP1.6@109.829,100.685 ccw(c108.848,99.704) 108.848,101.092 ccw(c108.848,102.48) JP1.6@109.829,101.499 ; JP1.6@110.05,100.548 109.207,101.139 ; JP1.6@110.05,101.636 109.207,101.045 ; JP1.6@110.101,100.533 109.207,101.045 ; JP1.6@110.101,101.651 109.207,101.139 ; JP1.6@110.144,100.524 108.436,101.092 ; JP1.6@110.144,101.66 108.436,101.092 ; JP1.6@110.201,100.87 109.207,101.139 ; JP1.6@110.201,101.314 109.207,101.045 ; KIRI2.18@91.41,98.557 92.104,99.318 ; KIRI2.18@91.41,98.557 92.171,99.251 ; KIRI2.18@91.41,98.557 92.675,99.822 ; 92.104,99.318 91.261,98.726 92.675,99.822 ; 92.171,99.251 91.579,98.408 92.675,99.822 ; 92.675,99.822 v1(96.012,99.822) ; 94.462,99.822 v1(96.012,99.822) ; 95.43,99.795 v1(96.012,99.822) ; 95.43,99.849 v1(96.012,99.822) ; v1(102.362,97.409) 102.944,97.436 ; v1(102.362,97.409) 102.944,97.382 ; v1(102.362,97.409) 103.886,97.409 ; 103.886,97.409 107.569,101.092 JP1.6@110.236,101.092 ; 108.436,101.092 110.222,101.317 109.207,101.139 ; 108.436,101.092 110.222,100.867 109.207,101.045 ; 109.207,101.045 JP1.6@110.236,101.092 ; 109.207,101.139 JP1.6@110.236,101.092
  Bottom Layer w0.35: KIRI.18@84.122,99.02 85.68,99.777 ; KIRI.18@84.155,99.043 85.149,99.313 ; KIRI.18@84.202,99.068 85.216,99.246 ; KIRI.18@84.322,98.734 85.216,99.246 ; KIRI.18@84.455,99.127 ccw(c84.455,100.515) 85.437,99.534 ccw(c86.418,98.552) KIRI.18@85.03,98.552 ; KIRI.18@84.637,98.419 85.149,99.313 ; KIRI.18@84.923,98.219 85.68,99.777 ; KIRI.18@84.946,98.252 85.216,99.246 ; KIRI.18@84.971,98.299 85.149,99.313 ; KIRI2.18@91.003,98.15 ccw(c90.022,97.169) 90.022,98.557 ccw(c90.022,99.945) KIRI2.18@91.003,98.964 ; KIRI2.18@91.224,98.013 90.381,98.604 ; KIRI2.18@91.224,99.101 90.381,98.51 ; KIRI2.18@91.275,97.998 90.381,98.51 ; KIRI2.18@91.275,99.116 90.381,98.604 ; KIRI2.18@91.3,97.993 89.911,98.557 ; KIRI2.18@91.3,99.121 89.911,98.557 ; KIRI2.18@91.375,98.335 90.381,98.604 ; KIRI2.18@91.375,98.779 90.381,98.51 ; KIRI2.18@91.393,98.333 89.911,98.557 ; KIRI2.18@91.393,98.781 89.911,98.557 ; KIRI2.18@91.396,98.332 90.381,98.51 ; KIRI2.18@91.396,98.782 90.381,98.604 ; v1@95.804,99.572 97.254,98.58 v1@96.262,100.03 ; v1@96.012,99.497 cw(c96.012,98.712) 96.567,99.267 cw(c97.122,99.822) v1@96.337,99.822 ; v1(96.012,99.822) 98.425,97.409 v1(102.362,97.409) ; v1@102.132,97.179 ccw(c101.577,96.624) 101.577,97.409 ccw(c101.577,98.194) v1@102.132,97.639 ; v1@102.257,97.101 101.78,97.436 ; v1@102.257,97.717 101.78,97.382 ; v1@102.286,97.093 101.78,97.382 ; v1@102.286,97.725 101.78,97.436 ; v1@102.328,97.086 100.812,97.409 ; v1@102.328,97.732 100.812,97.409 ; KIRI.18@84.455,98.552 85.216,99.246 ; KIRI.18@84.455,98.552 85.149,99.313 ; KIRI.18@84.455,98.552 85.68,99.777 ; 85.149,99.313 84.306,98.721 85.68,99.777 ; 85.216,99.246 84.624,98.403 85.68,99.777 ; 85.68,99.777 88.691,99.777 89.911,98.557 ; 89.911,98.557 KIRI2.18@91.41,98.557 ; 89.911,98.557 KIRI2.18@91.41,98.557 ; 90.381,98.51 KIRI2.18@91.41,98.557 ; 90.381,98.604 KIRI2.18@91.41,98.557 ; 100.812,97.409 v1(102.362,97.409) ; 101.78,97.382 v1(102.362,97.409) ; 101.78,97.436 v1(102.362,97.409)
NetJP1_8: JP1.8 KANAN2.37 KANAN.37 | length 151.5
  Top Layer w0.35: JP1.8@109.903,103.164 111.461,102.407 ; JP1.8@109.936,103.141 110.93,102.871 ; JP1.8@109.983,103.116 110.997,102.938 ; JP1.8@110.103,103.45 110.997,102.938 ; JP1.8@110.236,103.057 cw(c110.236,101.669) 111.218,102.65 cw(c112.199,103.632) JP1.8@110.811,103.632 ; JP1.8@110.418,103.765 110.93,102.871 ; JP1.8@110.704,103.965 111.461,102.407 ; JP1.8@110.727,103.932 110.997,102.938 ; JP1.8@110.752,103.885 110.93,102.871 ; KANAN.37@144.543,123.748 146.382,122.714 ; KANAN.37@144.59,123.715 145.584,123.445 ; KANAN.37@144.636,123.69 145.651,123.512 ; KANAN.37@144.74,124.039 146.382,122.714 ; KANAN.37@144.741,124.037 145.584,123.445 ; KANAN.37@144.757,124.024 145.651,123.512 ; KANAN.37@144.89,123.631 cw(c144.89,122.243) 145.872,123.224 cw(c146.853,124.206) KANAN.37@145.465,124.206 ; KANAN.37@145.057,124.356 146.382,122.714 ; KANAN.37@145.059,124.355 145.651,123.512 ; KANAN.37@145.072,124.339 145.584,123.445 ; KANAN.37@145.348,124.553 146.382,122.714 ; KANAN.37@145.381,124.506 145.651,123.512 ; KANAN.37@145.406,124.459 145.584,123.445 ; JP1.8@110.236,103.632 110.997,102.938 ; JP1.8@110.236,103.632 110.93,102.871 ; JP1.8@110.236,103.632 111.461,102.407 ; 110.93,102.871 110.087,103.463 111.461,102.407 ; 110.997,102.938 110.405,103.781 111.461,102.407 ; 111.461,102.407 114.763,102.407 123.317,93.853 134.493,93.853 135.89,95.25 135.89,104.267 139.319,107.696 145.669,107.696 146.812,108.839 146.812,122.284 KANAN.37@144.89,124.206 ; KANAN.37@144.89,124.206 145.651,123.512 ; KANAN.37@144.89,124.206 145.584,123.445
  Bottom Layer w0.35: KANAN.37@144.925,123.984 145.919,124.253 ; KANAN.37@144.925,124.428 145.919,124.159 ; KANAN.37@144.982,123.638 146.685,124.206 ; KANAN.37@144.982,124.774 146.685,124.206 ; KANAN.37@145.025,123.647 145.919,124.159 ; KANAN.37@145.025,124.765 145.919,124.253 ; KANAN.37@145.076,123.662 145.919,124.253 ; KANAN.37@145.076,124.75 145.919,124.159 ; KANAN.37@145.297,123.799 cw(c146.278,122.818) 146.278,124.206 cw(c146.278,125.594) KANAN.37@145.297,124.613 ; KANAN2.37@151.278,124.108 cw(c150.013,123.889) 150.921,122.981 ; KANAN2.37@151.314,124.426 151.218,123.446 ; KANAN2.37@151.329,124.46 150.921,122.981 ; 151.377,123.437 cw(c151.845,122.969) KANAN2.37@151.845,123.631 ; 151.398,123.458 ccw(c150.827,124.03) KANAN2.37@151.623,124.168 ; KANAN2.37@152.001,124.044 151.218,123.446 ; KANAN2.37@152.014,124.058 150.921,122.981 ; KANAN2.37@152.163,123.727 151.218,123.446 ; KANAN2.37@152.231,123.78 150.921,122.981 ; KANAN.37@144.89,124.206 145.919,124.159 ; KANAN.37@144.89,124.206 145.919,124.253 ; KANAN.37@144.89,124.206 146.685,124.206 ; 145.919,124.159 144.904,123.981 146.685,124.206 ; 145.919,124.253 144.904,124.431 146.685,124.206 ; 146.685,124.206 147.91,122.981 150.921,122.981 ; 150.921,122.981 KANAN2.37@151.845,124.206 ; 150.921,122.981 151.656,124.328 151.218,123.446 ; 150.921,122.981 151.845,123.905 KANAN2.37@151.845,124.206 ; 151.218,123.446 KANAN2.37@151.845,124.206
NetKANAN2_5: KANAN2.5 KANAN2.6 KANAN.5 KANAN.6 | length 203.5
  Bottom Layer w0.35: KANAN.6@142.318,83.343 KANAN.5@144.252,83.18 ; KANAN.6@142.318,83.789 KANAN.5@144.252,83.952 ; KANAN.6@142.32,82.992 KANAN.5@144.252,83.18 ; KANAN.6@142.32,84.14 KANAN.5@144.252,83.952 ; KANAN.6@142.347,83.341 KANAN.5@144.199,83.427 ; KANAN.6@142.347,83.791 KANAN.5@144.199,83.705 ; KANAN.6@142.38,83.343 KANAN.5@144.199,83.705 ; KANAN.6@142.38,83.789 KANAN.5@144.199,83.427 ; KANAN.6@142.385,83.344 143.379,83.613 ; KANAN.6@142.385,83.788 143.379,83.519 ; KANAN.6@142.396,82.993 KANAN.5@144.199,83.427 ; KANAN.6@142.396,84.139 KANAN.5@144.199,83.705 ; KANAN.6@142.407,83.348 KANAN.5@144.252,83.952 ; KANAN.6@142.407,83.784 KANAN.5@144.252,83.18 ; KANAN.6@142.442,82.998 KANAN.5@144.15,83.566 ; KANAN.6@142.442,84.134 KANAN.5@144.15,83.566 ; KANAN.6@142.482,83.006 KANAN.5@144.199,83.705 ; KANAN.6@142.482,84.126 KANAN.5@144.199,83.427 ; KANAN.6@142.485,83.007 143.379,83.519 ; KANAN.6@142.485,84.125 143.379,83.613 ; KANAN.6@142.536,83.022 143.379,83.613 ; KANAN.6@142.536,84.11 143.379,83.519 ; KANAN.6@142.547,83.026 KANAN.5@144.252,83.952 ; KANAN.6@142.547,84.106 KANAN.5@144.252,83.18 ; KANAN.6@142.757,83.159 cw(c143.738,82.178) 143.738,83.566 cw(c143.738,84.954) KANAN.6@142.757,83.973 ; KANAN.5@144.483,83.159 ccw(c143.502,82.178) 143.502,83.566 ccw(c143.502,84.954) KANAN.5@144.483,83.973 ; KANAN.5@144.704,83.022 143.861,83.613 ; KANAN.5@144.704,84.11 143.861,83.519 ; KANAN.5@144.755,83.007 143.861,83.519 ; KANAN.5@144.755,84.125 143.861,83.613 ; KANAN.5@144.798,82.998 KANAN.6@143.09,83.566 ; KANAN.5@144.798,84.134 KANAN.6@143.09,83.566 ; KANAN.5@144.855,83.344 143.861,83.613 ; KANAN.5@144.855,83.788 143.861,83.519 ; KANAN.5@144.876,83.341 143.861,83.519 ; KANAN.5@144.876,83.791 143.861,83.613 ; KANAN.5@144.876,83.341 KANAN.6@143.09,83.566 ; KANAN.5@144.876,83.791 KANAN.6@143.09,83.566 ; KANAN.5@144.925,83.344 145.919,83.613 ; KANAN.5@144.925,83.788 145.919,83.519 ; KANAN.5@144.982,82.998 146.69,83.566 ; KANAN.5@144.982,84.134 146.69,83.566 ; KANAN.5@145.025,83.007 145.919,83.519 ; KANAN.5@145.025,84.125 145.919,83.613 ; KANAN.5@145.076,83.022 145.919,83.613 ; KANAN.5@145.076,84.11 145.919,83.519 ; KANAN.5@145.297,83.159 cw(c146.278,82.178) 146.278,83.566 cw(c146.278,84.954) KANAN.5@145.297,83.973 ; KANAN2.6@148.898,83.159 ccw(c147.917,82.178) 147.917,83.566 ccw(c147.917,84.954) KANAN2.6@148.898,83.973 ; KANAN2.6@149.119,83.022 148.276,83.613 ; KANAN2.6@149.119,84.11 148.276,83.519 ; KANAN2.6@149.17,83.007 148.276,83.519 ; KANAN2.6@149.17,84.125 148.276,83.613 ; KANAN2.6@149.213,82.998 147.505,83.566 ; KANAN2.6@149.213,84.134 147.505,83.566 ; KANAN2.6@149.27,83.344 148.276,83.613 ; KANAN2.6@149.27,83.788 148.276,83.519 ; KANAN2.6@149.273,83.343 KANAN2.5@151.207,83.18 ; KANAN2.6@149.273,83.789 KANAN2.5@151.207,83.952 ; KANAN2.6@149.275,82.992 KANAN2.5@151.207,83.18 ; KANAN2.6@149.275,84.14 KANAN2.5@151.207,83.952 ; KANAN2.6@149.302,83.341 KANAN2.5@151.154,83.427 ; KANAN2.6@149.302,83.791 KANAN2.5@151.154,83.705 ; KANAN2.6@149.336,83.343 KANAN2.5@151.154,83.705 ; KANAN2.6@149.336,83.789 KANAN2.5@151.154,83.427 ; KANAN2.6@149.34,83.344 150.334,83.613 ; KANAN2.6@149.34,83.788 150.334,83.519 ; KANAN2.6@149.351,82.993 KANAN2.5@151.154,83.427 ; KANAN2.6@149.351,84.139 KANAN2.5@151.154,83.705 ; KANAN2.6@149.362,83.348 KANAN2.5@151.207,83.952 ; KANAN2.6@149.362,83.784 KANAN2.5@151.207,83.18 ; KANAN2.6@149.397,82.998 KANAN2.5@151.105,83.566 ; KANAN2.6@149.397,84.134 KANAN2.5@151.105,83.566 ; KANAN2.6@149.437,83.006 KANAN2.5@151.154,83.705 ; KANAN2.6@149.437,84.126 KANAN2.5@151.154,83.427 ; KANAN2.6@149.44,83.007 150.334,83.519 ; KANAN2.6@149.44,84.125 150.334,83.613 ; KANAN2.6@149.491,83.022 150.334,83.613 ; KANAN2.6@149.491,84.11 150.334,83.519 ; KANAN2.6@149.502,83.026 KANAN2.5@151.207,83.952 ; KANAN2.6@149.502,84.106 KANAN2.5@151.207,83.18 ; KANAN2.6@149.712,83.159 cw(c150.693,82.178) 150.693,83.566 cw(c150.693,84.954) KANAN2.6@149.712,83.973 ; KANAN2.5@151.438,83.159 ccw(c150.457,82.178) 150.457,83.566 ccw(c150.457,84.954) KANAN2.5@151.438,83.973 ; KANAN2.5@151.659,83.022 150.816,83.613 ; KANAN2.5@151.659,84.11 150.816,83.519 ; KANAN2.5@151.71,83.007 150.816,83.519 ; KANAN2.5@151.71,84.125 150.816,83.613 ; KANAN2.5@151.753,82.998 KANAN2.6@150.045,83.566 ; KANAN2.5@151.753,84.134 KANAN2.6@150.045,83.566 ; KANAN2.5@151.81,83.344 150.816,83.613 ; KANAN2.5@151.81,83.788 150.816,83.519 ; KANAN.6@142.35,83.566 KANAN.5@144.199,83.427 ; KANAN.6@142.35,83.566 KANAN.5@144.252,83.18 ; KANAN.6@142.35,83.566 KANAN.5@144.199,83.705 ; KANAN.6@142.35,83.566 KANAN.5@144.252,83.952 ; KANAN.6@142.35,83.566 143.379,83.519 ; KANAN.6@142.35,83.566 143.379,83.613 ; KANAN.6@142.35,83.566 KANAN.5@144.89,83.566 ; 143.379,83.519 142.364,83.341 KANAN.5@144.15,83.566 ; 143.379,83.613 142.364,83.791 KANAN.5@144.15,83.566 ; 143.861,83.519 KANAN.5@144.89,83.566 ; 143.861,83.613 KANAN.5@144.89,83.566 ; KANAN.5@144.89,83.566 145.919,83.519 ; KANAN.5@144.89,83.566 145.919,83.613 ; KANAN.5@144.89,83.566 KANAN2.6@149.305,83.566 ; 145.919,83.519 144.904,83.341 146.69,83.566 ; 145.919,83.613 144.904,83.791 146.69,83.566 ; 147.505,83.566 149.291,83.791 148.276,83.613 ; 147.505,83.566 149.291,83.341 148.276,83.519 ; 148.276,83.519 KANAN2.6@149.305,83.566 ; 148.276,83.613 KANAN2.6@149.305,83.566 ; KANAN2.6@149.305,83.566 KANAN2.5@151.154,83.427 ; KANAN2.6@149.305,83.566 KANAN2.5@151.207,83.18 ; KANAN2.6@149.305,83.566 150.334,83.519 ; KANAN2.6@149.305,83.566 KANAN2.5@151.154,83.705 ; KANAN2.6@149.305,83.566 KANAN2.5@151.207,83.952 ; KANAN2.6@149.305,83.566 150.334,83.613 ; KANAN2.6@149.305,83.566 KANAN2.5@151.845,83.566 ; KANAN2.6@150.045,83.566 151.831,83.791 150.816,83.613 ; KANAN2.6@150.045,83.566 151.831,83.341 150.816,83.519 ; 150.334,83.519 149.319,83.341 KANAN2.5@151.105,83.566 ; 150.334,83.613 149.319,83.791 KANAN2.5@151.105,83.566 ; 150.816,83.519 KANAN2.5@151.845,83.566 ; 150.816,83.613 KANAN2.5@151.845,83.566
NetKANAN2_7: KANAN2.7 KANAN.7 | length 61.6
  Bottom Layer w0.35: KANAN.7@144.701,85.563 146.745,85.157 ; KANAN.7@144.725,85.555 146.192,85.417 ; KANAN.7@144.798,85.9 146.745,85.157 ; KANAN.7@144.8,85.9 146.192,85.417 ; KANAN.7@144.845,85.886 145.883,85.788 ; KANAN.7@144.87,86.229 cw(c145.089,84.882) 146.055,85.847 ; KANAN.7@144.872,85.531 145.883,85.788 ; KANAN.7@144.926,85.884 cw(c145.225,84.051) 146.538,85.364 ; KANAN.7@144.982,85.538 cw(c145.36,83.22) 147.021,84.881 ; KANAN.7@144.981,86.312 145.883,85.788 ; KANAN.7@145.003,86.3 146.745,85.157 ; KANAN.7@145.01,86.296 146.192,85.417 ; KANAN.7@145.21,86.584 145.883,85.788 ; KANAN.7@145.22,86.577 146.745,85.157 ; KANAN.7@145.253,86.552 146.192,85.417 ; KANAN.7@145.41,85.861 cw(c145.796,85.68) 145.796,86.106 ; KANAN.7@145.41,86.351 ccw(c145.796,86.532) 145.796,86.106 ; 150.804,84.981 ccw(c149.679,86.106) KANAN2.7@151.27,86.106 ; 151.007,85.184 cw(c151.845,84.346) KANAN2.7@151.845,85.531 ; KANAN2.7@151.346,86.392 151.057,85.311 ; KANAN2.7@151.363,86.42 150.704,84.881 ; KANAN2.7@151.67,86.248 151.057,85.311 ; KANAN2.7@151.67,86.248 150.704,84.881 ; KANAN2.7@151.988,85.932 151.057,85.311 ; KANAN2.7@151.999,85.942 150.704,84.881 ; KANAN2.7@152.136,85.61 151.057,85.311 ; KANAN2.7@152.192,85.648 150.704,84.881 ; KANAN.7@144.89,86.106 145.883,85.788 ; KANAN.7@144.89,86.106 146.192,85.417 ; KANAN.7@144.89,86.106 145.796,86.106 ; KANAN.7@144.89,86.106 146.745,85.157 ; KANAN.7@144.89,86.106 145.796,86.106 ; 145.796,86.106 144.918,85.883 145.796,86.106 ; 145.796,86.106 144.918,86.329 145.796,86.106 ; 145.796,86.106 145.072,85.561 145.796,86.106 ; 145.796,86.106 145.072,86.651 145.796,86.106 ; 145.796,86.106 147.021,84.881 150.704,84.881 ; 150.704,84.881 KANAN2.7@151.845,86.106 ; 150.704,84.881 151.845,86.022 KANAN2.7@151.845,86.106 ; 151.057,85.311 KANAN2.7@151.845,86.106
NetKANAN2_8: KANAN2.8 KANAN.8 | length 48.9
  Bottom Layer w0.35: KANAN.8@142.017,86.574 143.575,87.331 ; KANAN.8@142.05,86.597 143.044,86.867 ; KANAN.8@142.096,86.622 143.111,86.8 ; KANAN.8@142.217,86.288 143.111,86.8 ; KANAN.8@142.35,86.681 ccw(c142.35,88.069) 143.332,87.088 ccw(c144.313,86.106) KANAN.8@142.925,86.106 ; KANAN.8@142.532,85.973 143.044,86.867 ; KANAN.8@142.818,85.773 143.575,87.331 ; KANAN.8@142.841,85.806 143.111,86.8 ; KANAN.8@142.866,85.853 143.044,86.867 ; KANAN2.8@148.898,85.699 ccw(c147.917,84.718) 147.917,86.106 ccw(c147.917,87.494) KANAN2.8@148.898,86.513 ; KANAN2.8@149.119,85.562 148.276,86.153 ; KANAN2.8@149.119,86.65 148.276,86.059 ; KANAN2.8@149.17,85.547 148.276,86.059 ; KANAN2.8@149.17,86.665 148.276,86.153 ; KANAN2.8@149.213,85.538 147.505,86.106 ; KANAN2.8@149.213,86.674 147.505,86.106 ; KANAN2.8@149.27,85.884 148.276,86.153 ; KANAN2.8@149.27,86.328 148.276,86.059 ; KANAN.8@142.35,86.106 143.044,86.867 ; KANAN.8@142.35,86.106 143.111,86.8 ; KANAN.8@142.35,86.106 143.575,87.331 ; 143.044,86.867 142.201,86.275 143.575,87.331 ; 143.111,86.8 142.519,85.957 143.575,87.331 ; 143.575,87.331 146.095,87.331 147.32,86.106 KANAN2.8@149.305,86.106 ; 147.505,86.106 KANAN2.8@149.305,86.106 ; 147.505,86.106 149.291,86.331 148.276,86.153 ; 147.505,86.106 149.291,85.881 148.276,86.059 ; 148.276,86.059 KANAN2.8@149.305,86.106 ; 148.276,86.153 KANAN2.8@149.305,86.106